# Altium PCB PCB1.PcbDoc
Units mm, origin at the board's own origin, x right, y up, seen from the top; angles counter-clockwise.
Board outline 86.36 x 94.74 mm, 2 copper layers (Top Layer, Bottom Layer); 22 components, 28 nets, 118 pads, 0 vias.
Unrouted connection lines stored in the file: 1.
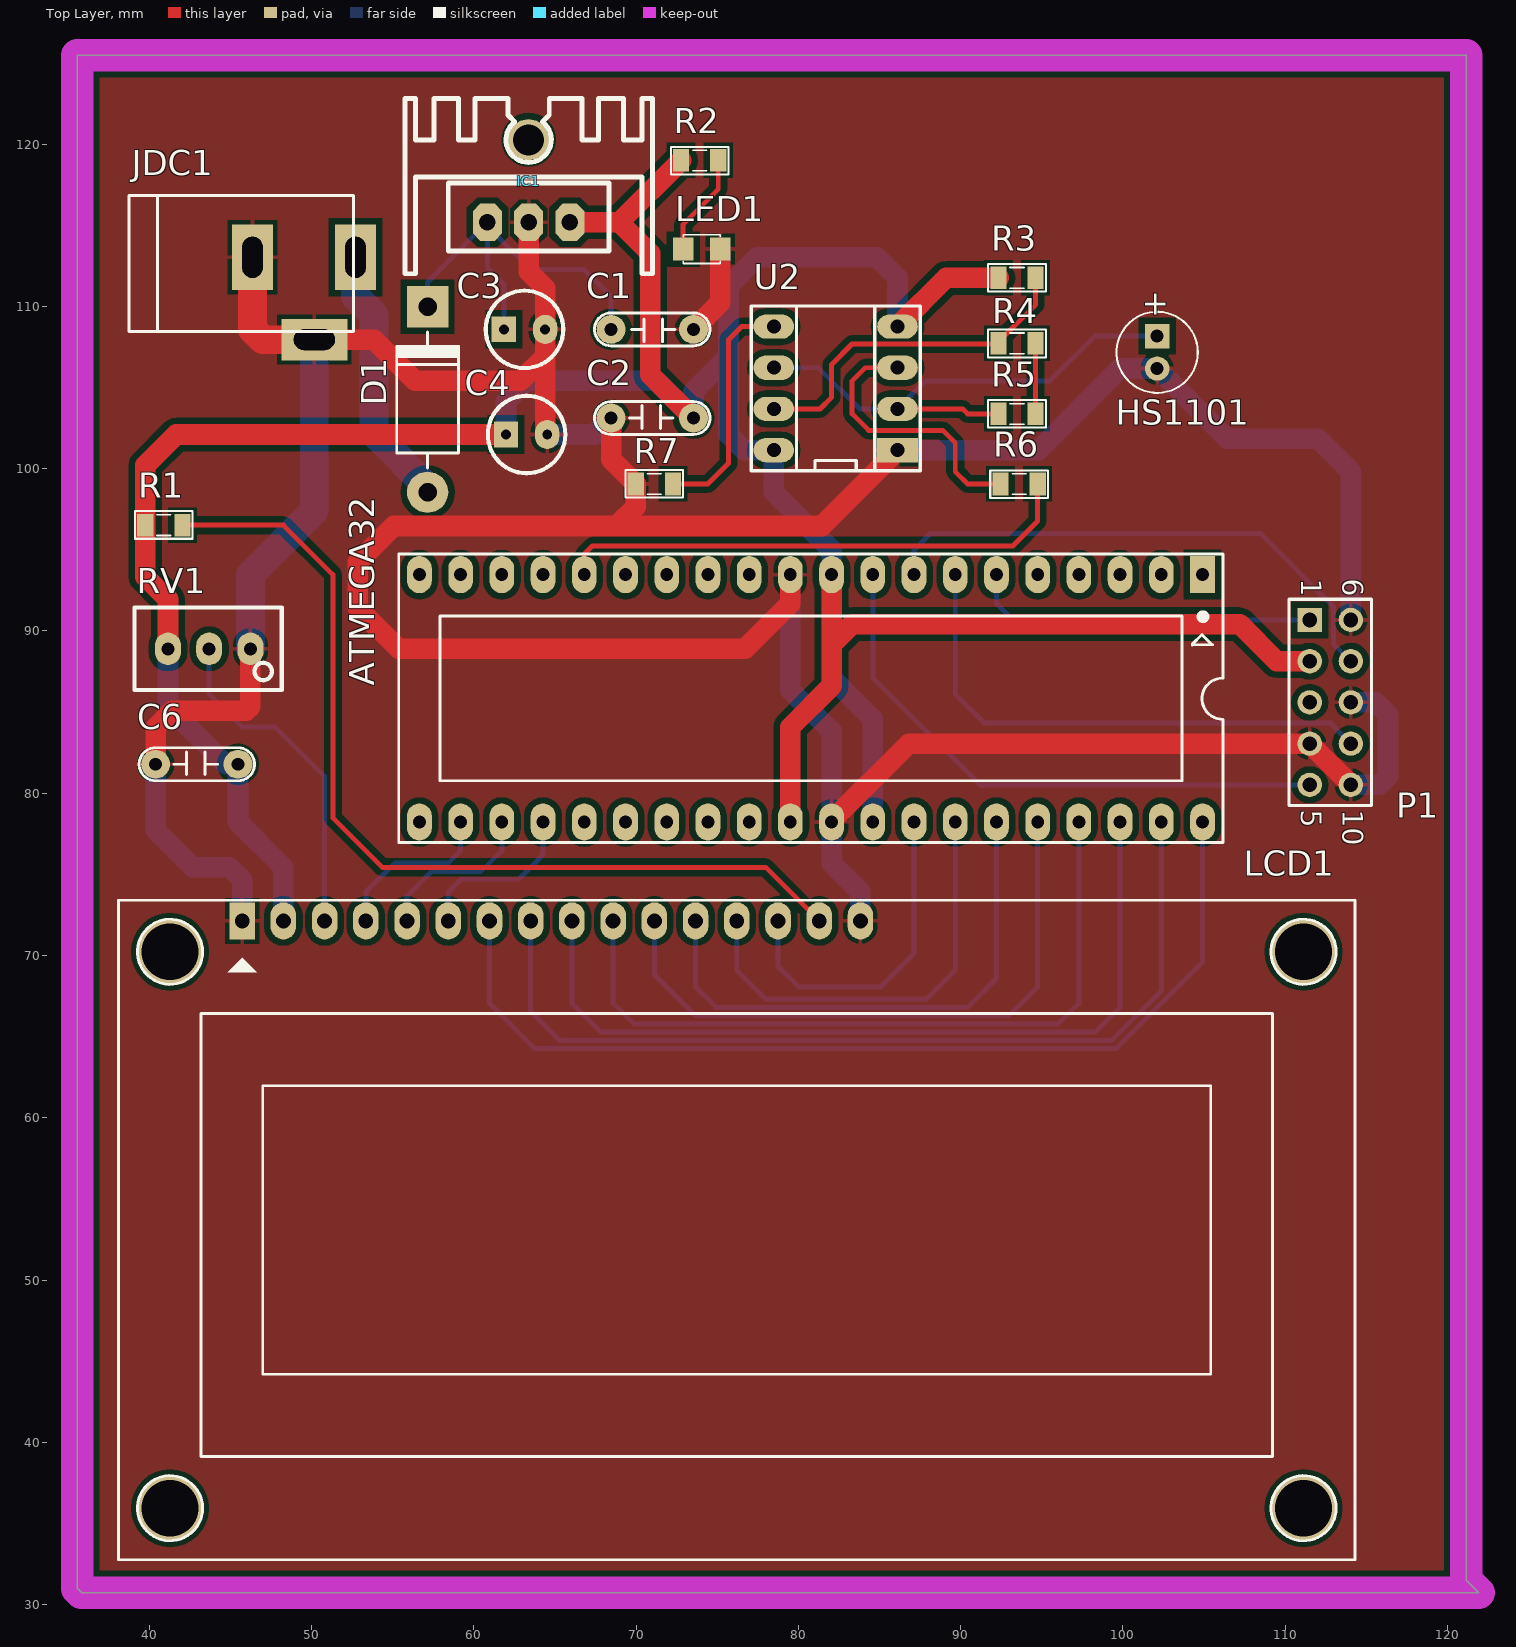
[diagram p0: Top Layer view]
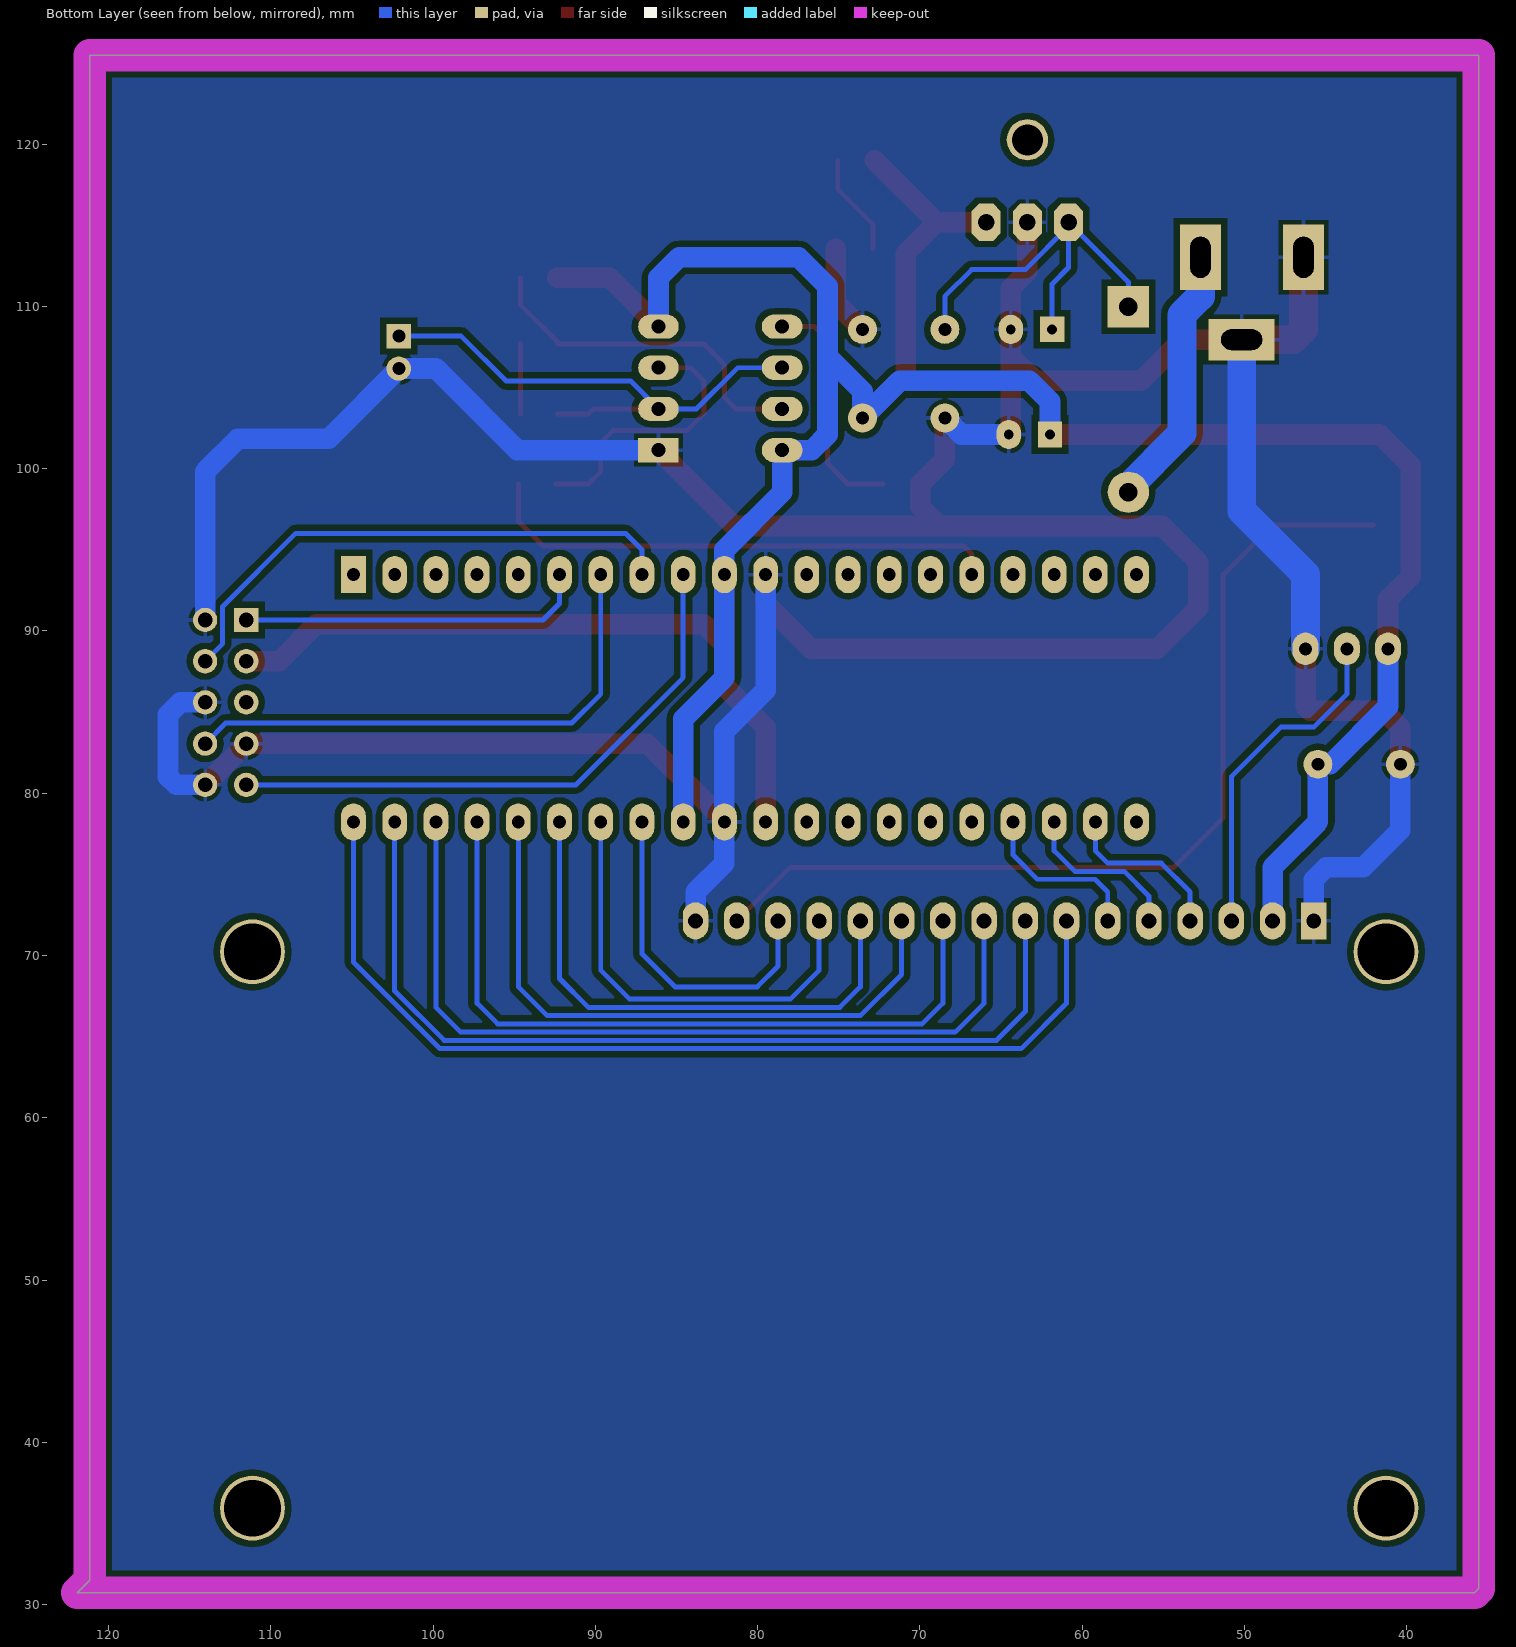
[diagram p1: Bottom Layer view, seen from below]
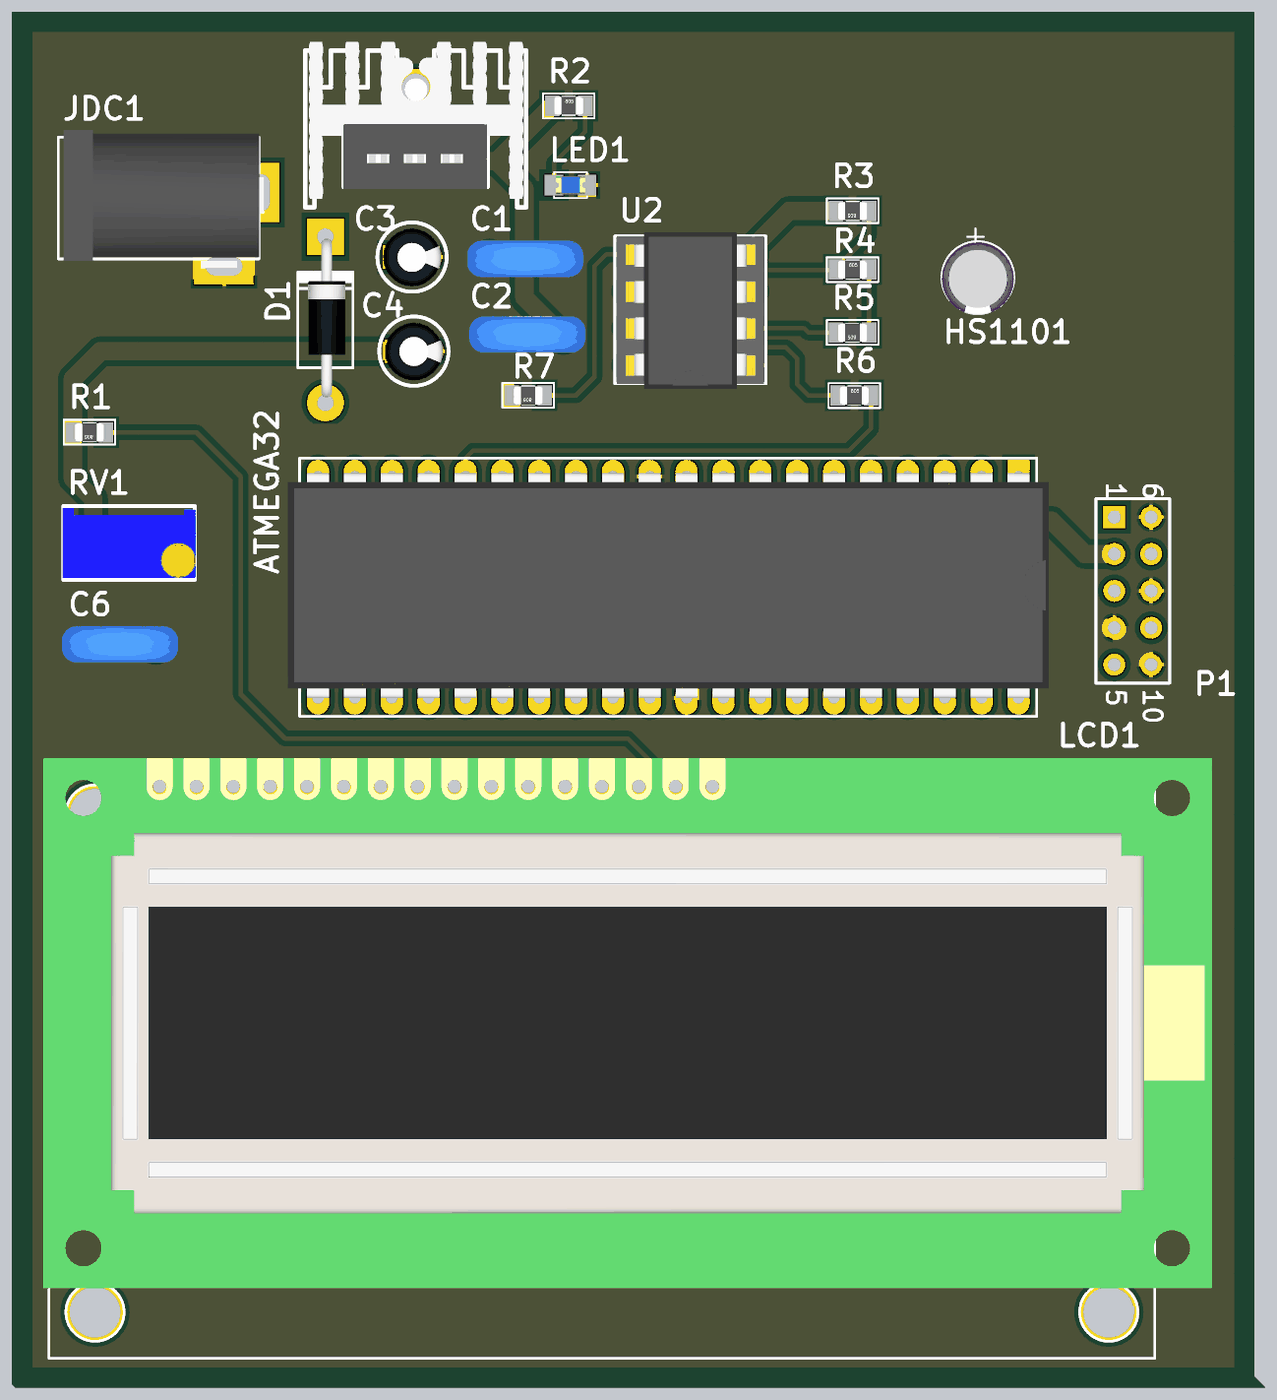
[diagram p2: 3D render of the assembled board from above, using the file's embedded part models]

## Layer stack, top to bottom
Top Solder: solder mask 0.0102, Solder Resist, Dk 3.5
Top Layer: signal copper 0.0356
Dielectric 1: dielectric 0.32, FR-4, Dk 4.8
Bottom Layer: signal copper 0.0356
Bottom Solder: solder mask 0.0102, Solder Resist, Dk 3.5

## Board outline
35.56,30.988 35.814,30.734 121.92,30.734 121.158,31.496 121.158,125.476 35.56,125.476

## Design rules (kind name [scope] priority, off if disabled: settings)
Clearance [All] p1: gap=0.178 ignorepadtopadclearanceinfootprint=TRUE except(0.381: Arc-Fill Arc-Poly Arc-Region Track-Fill Track-Poly Track-Region SMDPad-Fill SMDPad-Poly SMDPad-Region THPad-Fill THPad-Poly THPad-Region Via-Fill Via-Poly Via-Region Fill-Fill Fill-Poly Fill-Region Poly-Poly Poly-Region Region-Region)
PolygonConnect [All] p1: connectstyle=Relief reliefconductorwidth=0.254 reliefentries=4 polygonreliefangle="90 Angle" airgapwidth=0.254
RoutingVias [All] p1: holewidth=0.4 width=0.5 viastyle="Through Hole" minholewidth=0.4 minwidth=0.5 maxholewidth=0.4 maxwidth=0.5
SolderMaskExpansion [All] p1: expansion=0.102
Width [All] p1: maxlimit=1.778 minlimit=0.305 preferedwidth=1.27
30 further rules are at their usual default settings.

## Components (designator, comment, footprint, x,y, rotation, side; value= is the part's Value field where it differs from the comment)
ATMEGA32 "ATmega32A-PU" DIP40/W0.6 104.902,93.472 r180 top (schematic designator U1)
C1 "104" CN2 73.533,108.585 r180 top value=0.1uF
C2 "104" CN2 68.453,103.124 r0 top value=0.1uF
C3 "100uF/25V" CA-ALU-2.54 63.119,108.585 r0 top value=104
C4 "100uF/25V" CA-ALU-2.54 63.246,102.108 r0 top value=104
C6 "104" CN2 40.386,81.788 r0 top value=0.1uF
D1 "1N4007" D2A 57.15,109.982 r270 top
HS1101 "CN-ALU-DIP" CA-ALU-5 102.108,107.172 r270 top value=104 (schematic designator "HS1101 Sensor")
IC1 "LM7805" QTO-220H3 60.833,115.189 r0 top
JDC1 "Jac DC" DC-IN 49.53,110.49 r0 top
LCD1 "LCD16x2A" LCD16X2 45.72,72.136 r0 top
LED1 "LED" LED-0805-Blue 72.898,113.538 r0 top value="LED 3 - 5 ly 2 Colour" (schematic designator "LED1 - BLUE")
P1 "Header 5X2" HDR2X5_CEN 111.506,90.678 r270 top
R1 "330" RES-SMD-0805 40.894,96.52 r180 top
R2 "330" RES-SMD-0805 73.914,118.999 r0 top
R3 "51k" RES-SMD-0805 93.472,111.76 r180 top
R4 "5k6" RES-SMD-0805 93.472,107.728 r0 top
R5 "560k" RES-SMD-0805 93.472,103.378 r180 top
R6 "1k" RES-SMD-0805 93.599,99.06 r0 top
R7 "910k" RES-SMD-0805 71.12,99.06 r180 top
RV1 "RV 10K" RVAR10K 43.688,88.9 r180 top
U2 "NE555" DIP8 82.296,104.902 r180 top

## Footprints (in the part's own frame and the unit in brackets; to place one, negate y for a bottom-side part, rotate by r counter-clockwise, add the part's x,y. Pads: shape width x height; smd on the part's side, far side on the other; paste and mask are expansions set on the pad)
CA-ALU-2.54 [mm]
  rect 1.5x1.58 hole 0.6: 1(-1.27,0)
  oval 1.5x1.8 hole 0.6: 2(1.27,0)
  silkscreen extent -2.39,-2.39 2.39,2.39, body extent -2,-2.03 1.99,1.97, height 7.01
CA-ALU-5 [mm] "Polarized capacitors, Aluminum Electrolytic Capacitors, 2-Leads, Body 5x11x2x0.5"
  rect 1.5x1.5 hole 0.8: 1(-1,0)
  round 1.5 hole 0.8: 2(1,0)
  silkscreen extent -2.5,-2.5 2.5,2.5, body extent -2.41,-2.5 2.59,2.5, height 11
CN2 [mil]
  round 70 hole 31: 1(0,0) 2(200,0)
  silkscreen extent -40,-40 240,40, body extent -54,-44 260,55, height 407
D2A [mil] "Diode 2A, W 150mil, L 450mil"
  round 100 hole 45: 1(450,0)
  rect 100x100 hole 45: 2(0,0)
  silkscreen extent 61,-75 391,75, body extent 5,-47 435,54, height 100
DC-IN [mil] "Jac DC input"
  rect 100x160 hole 50 slot 100 at 90 deg: 1(125,100) 2(-125,100)
  rect 160x100 hole 50 slot 100 at 0 deg: 3(25,-100)
  silkscreen extent -425,-80 120,250, body extent -410,-105 134,269, height 434
DIP8 [mm]
  rect 2.5x1.5 hole 0.864: 1(-3.81,3.759)
  oval 2.5x1.5 hole 0.864: 2(-3.81,1.219) 3(-3.81,-1.321) 4(-3.81,-3.861) 5(3.81,-3.861) 6(3.81,-1.321) 7(3.81,1.219) 8(3.81,3.759)
  silkscreen extent -5.21,-5.13 5.21,5.03, body extent -5.08,-5.4 5.08,5.4, height 8.1
DIP40/W0.6 [mil] "40 PIN, W 600mil, Pin to pin 100mil"
  rect 60x90 hole 31: 1(0,0)
  oval 60x90 hole 31: 2(100,0) 3(200,0) 4(300,0) 5(400,0) 6(500,0) 7(600,0) 8(700,0) 9(800,0) 10(900,0) 11(1000,0) 12(1100,0) 13(1200,0) 14(1300,0) 15(1400,0) 16(1500,0) 17(1600,0) 18(1700,0) 19(1800,0) 20(1900,0) 21(1900,600) 22(1800,600) 23(1700,600) 24(1600,600) 25(1500,600) 26(1400,600) 27(1300,600) 28(1200,600) 29(1100,600) 30(1000,600) 31(900,600) 32(800,600) 33(700,600) 34(600,600) 35(500,600) 36(400,600) 37(300,600) 38(200,600) 39(100,600) 40(0,600)
  silkscreen extent -50,-50 1950,650, body extent -82,-10 1982,600, height 224
HDR2X5_CEN [mm] "Connector; Header; 5x2 Position"
  rect 1.5x1.5 hole 0.9: 1(0,0)
  round 1.5 hole 0.9: 2(2.54,0) 3(5.08,0) 4(7.62,0) 5(10.16,0) 6(0,2.54) 7(2.54,2.54) 8(5.08,2.54) 9(7.62,2.54) 10(10.16,2.54)
  silkscreen extent -1.27,-1.27 11.43,3.81
LCD16X2 [mil] "LCD dipslay 16x2, 16 pin"
  rect 62x90 hole 36: 1(0,0)
  oval 62x90 hole 36: 2(100,0) 3(200,0) 4(300,0) 5(400,0) 6(500,0) 7(600,0) 8(700,0) 9(800,0) 10(900,0) 11(1000,0) 12(1100,0) 13(1200,0) 14(1300,0) 15(1400,0) 16(1500,0)
  round 157.48 hole 137.8: "Hole 0"(-175,-1425) "Hole 0"(-175,-75) "Hole 0"(2575,-1425) "Hole 0"(2575,-75)
  silkscreen extent -300,-1550 2700,50, body extent -315,-1360 2855,77, height 414
LED-0805-Blue [mil]
  rect 50x55 smd: 1(0,0) 2(90,0)
  silkscreen extent 0,-35 90,35, body extent 5,-25 85,25, height 43
QTO-220H3 [mil] "TO-220 1-2-3"
  oct 70x90 hole 40: 1(0,0) 2(100,0) 3(200,0)
  round 100 hole 75: ""(100,200)
  silkscreen extent -200,-125 400,300, body extent -190,-102 392,323, height 984
RES-SMD-0805 [mil]
  rect 39.37x55 smd: 1(-45,0) 2(45,0)
  silkscreen extent -70,-34 70,33, body extent -39,-25 39,25, height 31
RVAR10K [mm] "Bien tro vi chinh"
  oval 1.6x2 hole 0.8: 1(-2.54,0) 2(0,0) 3(2.54,0)
  silkscreen extent -4.47,-2.54 4.6,2.54, body extent -4.54,-2.4 4.66,2.4, height 12.02

## Part data
ATMEGA32: "8-Bit AVR Microcontroller with 32K Bytes of In-System Programmable Flash Memory", Supplier Part Number 1=ATMEGA32-16PC-ND, Code_JEDEC=MS-011-AC, ComponentLink1Description=Datasheet, ComponentLink1URL=http://www.atmel.com/dyn/resources/prod_documents/doc2503.pdf, ComponentLink2Description="Atmel.com Home", ComponentLink2URL=http://www.atmel.com, DatasheetVersion=2503C-AVR-10/02, PackageDescription="40-lead (0.600\"/15.24mm Wide) Plastic Dual Inline Package (PDIP)", PackageReference=40P6, PackageVersion="revB, Sep-2001", Published=17-Sep-2003, Publisher="Altium Limited", Supplier 1=Digi-Key, Supplier 2=Mouser, Supplier Part Number 2=556-ATMEGA32-16PC
C1 C2 C6: library part CN2, "Cap np 104 => 105pF"
C3 C4: library part CN-ALU-DIP, "Capacitor (Semiconductor SIM Model)", LatestRevisionDate=17-Jul-2002, LatestRevisionNote="Re-released for DXP Platform.", PackageReference=C1206, Publisher="Altium Limited"
D1: library part D1A, "Diode 1A"
HS1101: "Capacitor (Semiconductor SIM Model)", LatestRevisionDate=17-Jul-2002, LatestRevisionNote="Re-released for DXP Platform.", PackageReference=C1206, Publisher="Altium Limited"
IC1: library part LM78xx, "On ap +, from + 5 to + 24VDC", =LM7808
JDC1: library part DCIN, "Jac DC input"
LCD1: library part LCD16x2, "LCD dipslay 16 char, 2 line"
LED1: library part "LED SMD"
P1: "Header, 5-Pin, Dual row", LatestRevisionDate=17-Jul-2002, LatestRevisionNote="Re-released for DXP Platform.", Publisher="Altium Limited"
R1 R2 R3 R4 R5 R6 R7: library part Res-SMD, "Resistor", Manufacturer="Generic Components", Class=Passive, Published=08/06/2000, Publisher="Altium Hobart Technology Centre"
RV1: library part "Variable Resistor", "Variable Resistor", LatestRevisionDate=17-Jul-2002, LatestRevisionNote="Re-released for DXP Platform.", PackageReference=VR5, Published=8-Jun-2000, Publisher="Altium Limited", Set Position=0.5, Sim Note="Enter the Resistance value and the set point into parameter fields."
U2: "TIMER IC", Current=200mA, Frequency=500kHz, Manufacturer=STMicroelectronics, Manufacturer Part Number=NE555DT, Operating Temperature="0°C ~ 70°C", Package / Case="8-SOIC (3.9mm Width)", Supplier Part Number=497-1962-2-ND, Voltage - Supply="4.5 V ~ 16 V", Category="Integrated Circuits (ICs)", Count=-, Packaging="Tape & Reel (TR)", RoHS="RoHS Compliant", Supplier=Digi-Key, Supplier 1=Digi-Key, Supplier Part Number 1=497-1962-2-ND, Type="555 Type, Timer/Oscillator (Single)"

## Nets (pads, with @x,y where several pads share a name; then routed paths per layer and width w, separated by ;. In a path a pad name is that pad's centre, name@x,y a point inside that pad or via, vN(x,y) a via of type N, cw(c..) or ccw(c..) an arc to the next point about the centre after c; other vN are vias at no path point)
GND: ATMEGA32.11 ATMEGA32.31 C1.1 C2.1 C3.2 C4.2 C6.1 HS1101.2 IC1.2 JDC1.2 JDC1.3 LCD1.1 LCD1.16 LED1.2 P1.4 P1.6 P1.8 P1.10 R7.2 RV1.1 U2.1 | length 280.4
  Top Layer w1.27: C6.1 40.386,84.074 41.402,85.09 45.974,85.09 46.228,85.344 RV1.1 ; JDC1.3 53.848,107.95 56.388,105.41 62.865,105.41 64.389,106.934 ; IC1.2 63.373,112.141 64.389,111.125 C3.2 64.389,106.934 ; C4.2 64.389,102.235 64.389,106.934 ; C2.1 68.453,100.584 R7.2 69.977,97.663 68.783,96.469 ; C1.1 75.184,110.236 LED1.2 ; ATMEGA32.11 79.502,91.694 76.708,88.9 55.372,88.9 52.832,91.44 52.832,94.234 55.067,96.469 68.783,96.469 ; ATMEGA32.31 82.042,78.3 86.8,83.058 P1.4 P1.10 ; U2.1 81.433,96.469 68.783,96.469
  Top Layer w1.778: JDC1.2 46.355,108.585 46.99,107.95 JDC1.3
  Bottom Layer w1.27: C6.1 40.386,77.724 42.672,75.438 44.958,75.438 45.72,74.676 LCD1.1 ; C4.2 67.437,102.108 C2.1 ; ATMEGA32.11 79.502,86.36 82.042,83.82 ATMEGA32.31 82.042,75.692 83.82,73.914 LCD1.16 ; U2.1 94.793,101.143 99.822,106.172 HS1101.2 106.426,101.854 112.014,101.854 114.046,99.822 P1.6 ; P1.10 115.824,80.518 116.332,81.026 116.332,84.836 115.57,85.598 P1.8
  Bottom Layer w1.778: RV1.1 46.228,93.472 50.165,97.409 JDC1.3
NetC1_2: C1.2 C3.1 D1.2 IC1.1 | length 25.4
  Bottom Layer w0.305: 56.388,97.917 56.515,97.79 ; D1.2 57.15,111.506 IC1.1 IC1.1@60.833,114.935 ; C3.1 61.849,111.379 60.833,112.395 IC1.1@60.833,114.935 ; C1.2 68.453,110.617 66.802,112.268 63.5,112.268 IC1.1@60.833,114.935
NetD1_1: D1.1 JDC1.1 | length 16.2
  Bottom Layer w1.778: JDC1.1 52.705,110.617 53.848,109.474 53.848,102.181 D1.1@57.314,98.716
"NetHS1101 Sensor_1": HS1101.1 R5.2 U2.2 U2.6 | length 32.9
  Top Layer w0.305: U2.2 90.119,103.683 90.424,103.378 R5.2
  Bottom Layer w0.305: U2.6 81.229,106.223 83.769,103.683 U2.2 87.833,105.41 95.504,105.41 98.266,108.172 HS1101.1
NetLCD1_3: LCD1.3 RV1.2 | length 20.9
  Bottom Layer w0.305: RV1.2 43.688,86.106 45.72,84.074 47.752,84.074 50.8,81.026 LCD1.3
NetLCD1_15: LCD1.15 R1.1 | length 58.1
  Top Layer w0.305: R1.1 48.26,96.52 51.308,93.472 51.308,78.486 54.356,75.438 77.978,75.438 LCD1.15
"NetLED1 - BLUE_1": LED1.1 R2.2 | length 6.4
  Top Layer w0.305: LED1.1 72.898,115.062 75.057,117.221 R2.2
NetR3_1: R3.1 R4.1 U2.7 | length 21.7
  Top Layer w0.305: U2.7 81.331,103.683 82.042,104.394 82.042,106.426 83.298,107.682 92.283,107.682 R4.1 92.329,107.823 94.615,110.109 R3.1
NetR4_2: R4.2 R5.1 | length 4.4
  Top Layer w0.305: R5.1 R4.2
NetR6_1: R6.1 U2.3 | length 17.1
  Top Layer w0.305: U2.3 84.125,106.223 83.312,105.41 83.312,103.378 84.328,102.362 88.9,102.362 89.662,101.6 89.662,99.822 90.424,99.06 R6.1
NetR7_1: R7.1 U2.5 | length 14.7
  Top Layer w0.305: R7.1 74.422,99.06 75.692,100.33 75.692,107.95 76.505,108.763 U2.5
PA0: ATMEGA32.40 LCD1.7 | length 61
  Bottom Layer w0.305: LCD1.7 60.96,67.056 63.754,64.262 99.568,64.262 104.902,69.596 ATMEGA32.40
PA1: ATMEGA32.39 LCD1.8 | length 56.9
  Bottom Layer w0.305: LCD1.8 63.5,66.548 65.278,64.77 99.314,64.77 102.362,67.818 ATMEGA32.39
PA2: ATMEGA32.38 LCD1.9 | length 51.7
  Bottom Layer w0.305: LCD1.9 66.04,67.056 67.818,65.278 98.298,65.278 99.822,66.802 ATMEGA32.38
PA3: ATMEGA32.37 LCD1.10 | length 46
  Bottom Layer w0.305: LCD1.10 68.58,67.056 69.85,65.786 96.012,65.786 97.282,67.056 ATMEGA32.37
PA4: ATMEGA32.36 LCD1.11 | length 38.9
  Bottom Layer w0.305: LCD1.11 71.12,68.834 73.66,66.294 92.964,66.294 94.742,68.072 ATMEGA32.36
PA5: ATMEGA32.35 LCD1.12 | length 33.5
  Bottom Layer w0.305: LCD1.12 73.66,68.072 74.93,66.802 90.424,66.802 92.202,68.58 ATMEGA32.35
PA6: ATMEGA32.34 LCD1.13 | length 27.1
  Bottom Layer w0.305: LCD1.13 76.2,69.088 77.978,67.31 87.884,67.31 89.662,69.088 ATMEGA32.34
PA7: ATMEGA32.33 LCD1.14 | length 20.7
  Bottom Layer w0.305: LCD1.14 78.74,69.342 80.01,68.072 85.09,68.072 87.122,70.104 ATMEGA32.33
PB5/MOSI: ATMEGA32.6 P1.1 | length 21.5
  Bottom Layer w0.305: ATMEGA32.6 92.202,91.694 93.218,90.678 P1.1
PB6/MISO: ATMEGA32.7 P1.9 | length 33
  Bottom Layer w0.305: ATMEGA32.7 89.662,86.106 91.44,84.328 112.776,84.328 P1.9
PB7/SCK: ATMEGA32.8 P1.7 | length 33.5
  Bottom Layer w0.305: ATMEGA32.8 87.122,94.996 88.138,96.012 108.458,96.012 112.966,91.504 112.966,89.218 P1.7
PD2/INT0: ATMEGA32.16 R6.2 | length 32.3
  Top Layer w0.305: ATMEGA32.16 66.802,94.742 67.31,95.25 93.218,95.25 94.742,96.774 R6.2
RE: ATMEGA32.24 LCD1.6 | length 10.6
  Bottom Layer w0.305: LCD1.6 58.42,73.914 59.207,74.701 62.763,74.701 64.262,76.2 ATMEGA32.24
RESET: ATMEGA32.9 P1.5 | length 36
  Bottom Layer w0.305: ATMEGA32.9 84.582,87.122 91.186,80.518 P1.5
RS: ATMEGA32.22 LCD1.4 | length 10.5
  Bottom Layer w0.305: LCD1.4 53.34,73.914 55.118,75.692 58.42,75.692 59.182,76.454 ATMEGA32.22
RW: ATMEGA32.23 LCD1.5 | length 10.3
  Bottom Layer w0.305: LCD1.5 55.88,73.66 57.404,75.184 60.452,75.184 61.722,76.454 ATMEGA32.23
VCC: ATMEGA32.10 ATMEGA32.30 ATMEGA32.32 C2.2 C4.1 C6.2 IC1.3 LCD1.2 P1.2 R1.2 R2.1 R3.2 RV1.3 U2.4 U2.8 | length 204.4
  Top Layer w1.27: RV1.3 41.148,91.948 39.751,93.345 R1.2 39.751,100.203 41.656,102.108 C4.1 ; IC1.3 68.961,115.189 ; R2.1 68.961,115.189 ; C2.2 70.866,105.791 70.866,113.284 68.961,115.189 ; ATMEGA32.30 79.502,84.074 82.042,86.614 82.042,89.154 ; ATMEGA32.10 82.042,89.154 ; U2.4 89.103,111.76 R3.2 ; P1.2 109.474,88.138 107.188,90.424 83.312,90.424 82.042,89.154
  Bottom Layer w1.27: RV1.3 41.148,85.344 44.704,81.788 C6.2 45.466,78.232 48.26,75.438 LCD1.2 ; C4.1 61.976,104.14 63.246,105.41 71.247,105.41 C2.2 73.533,104.775 75.692,106.934 ; ATMEGA32.32 84.582,84.582 82.042,87.122 ATMEGA32.10 82.042,94.996 78.486,98.552 U2.8 76.657,101.143 75.692,102.108 75.692,106.934 ; U2.4 86.106,111.76 84.836,113.03 77.47,113.03 75.692,111.252 75.692,106.934
pads on no net: "LCD1.Hole 0" ATMEGA32.1 ATMEGA32.2 ATMEGA32.3 ATMEGA32.4 ATMEGA32.5 ATMEGA32.12 ATMEGA32.13 ATMEGA32.14 ATMEGA32.15 ATMEGA32.17 ATMEGA32.18 ATMEGA32.19 ATMEGA32.20 ATMEGA32.21 ATMEGA32.25 ATMEGA32.26 ATMEGA32.27 ATMEGA32.28 ATMEGA32.29 IC1. P1.3

## Polygon pours and split planes (outlines as drawn)
GND on Bottom Layer (solid, remove dead copper, pour order 2): 24.638,138.176 122.682,138.176 134.112,126.746 134.112,25.908 127.762,19.558 126.492,20.828 29.464,20.828 29.464,133.35
GND on Top Layer (solid, remove dead copper, pour order 4): 25.654,133.604 25.654,30.988 32.766,23.876 139.446,23.876 143.256,27.686 138.176,32.766 138.176,133.35

## Keep-outs
Keep-Out Layer:
  the board outline again, w2

## Other copper
Top Layer:
  region net VCC: 73.533,103.124

## Text inside footprints (layer, text, board x,y; h text height)
HS1101: Top Overlay "+" at 101.371,110.997 h1.5 r270
P1: Top Overlay "6" at 113.538,93.218 h1.27 r270; Top Overlay "10" at 113.538,78.994 h1.27 r270; Top Overlay "5" at 110.998,78.994 h1.27 r270; Top Overlay "1" at 110.998,93.218 h1.27 r270